# EAGLE board BPv4-LCDv3 (EAGLE 5.09)
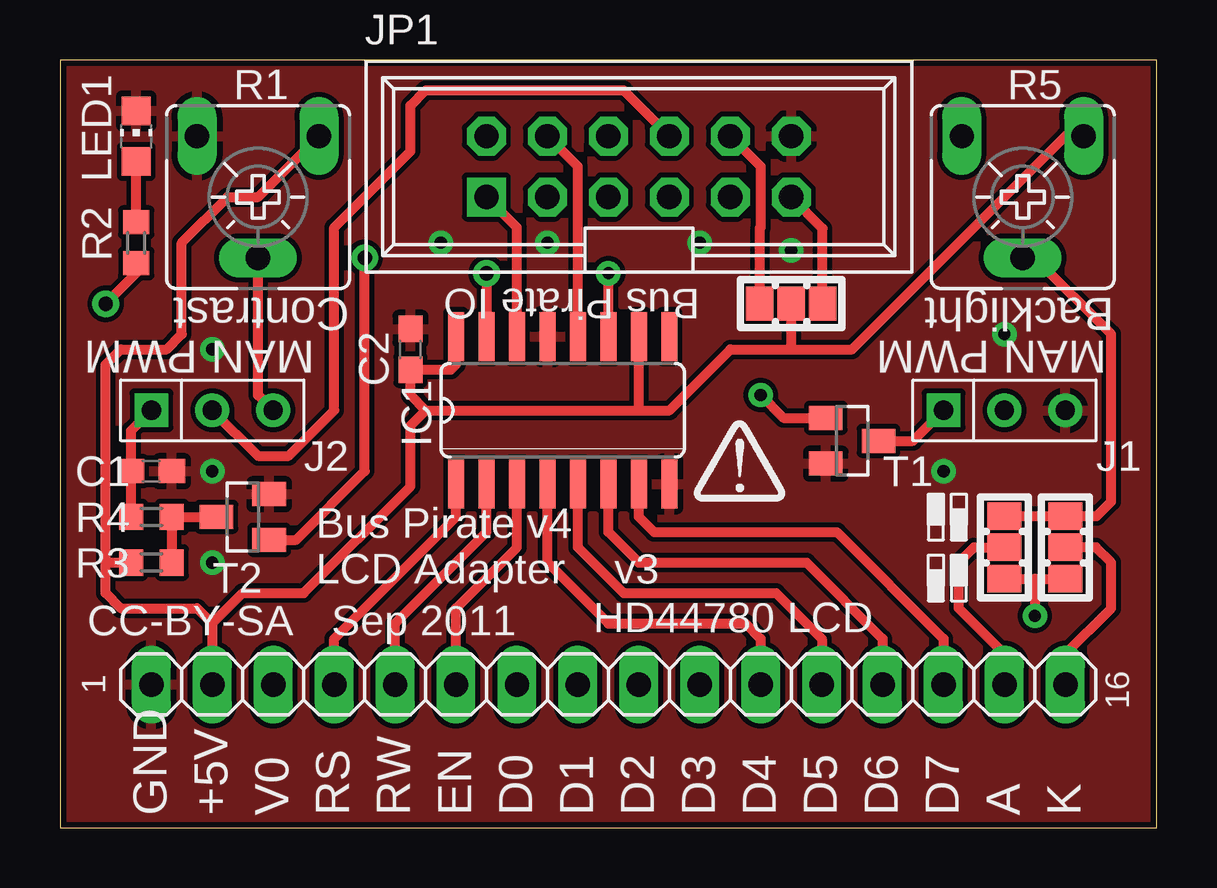
[diagram p0: board, top side]
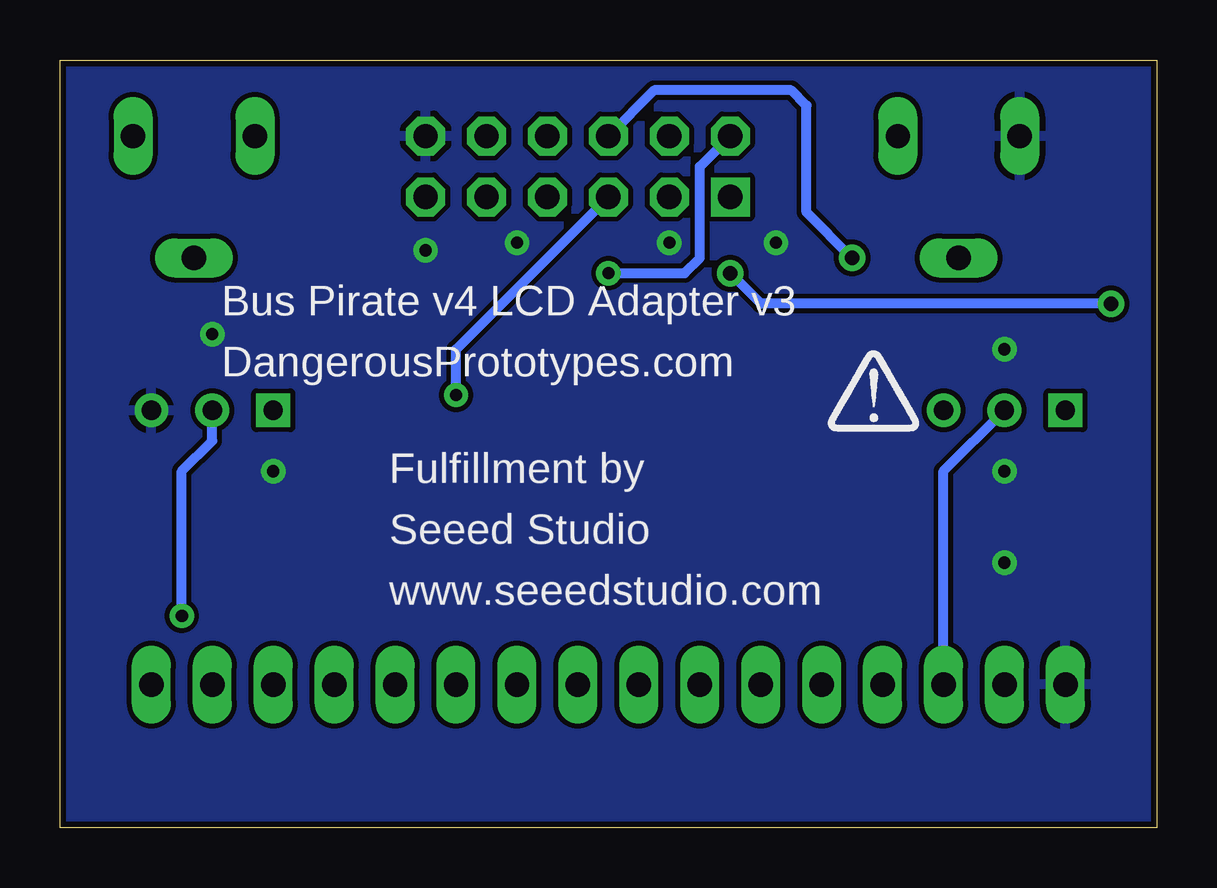
[diagram p1: board, bottom side, seen from below]

Size 45.72 x 32 mm. Coordinates in mm from the lower left corner, seen from the top.
Outline: 0,0 45.72,0 45.72,32 0,32 0,0
Copper layers (1*16): Top 0.035mm / dielectric 1.5mm / Bottom 0.035mm
Design rules "SparkFun": minimum track width 8mil, minimum drill 20mil, track to track 8mil, track to pad 8mil, pad to pad 8mil, via to via 8mil, smd to smd 8mil, copper to edge 10mil, drill to drill 8mil, minimum pad ring 12mil, minimum via ring 10mil, stop-mask expansion 4mil, vias tented up to drill 25mil, thermal gap 10mil

## Footprints (pad centres in the part's own frame; a part is rotated, then mirrored left to right if it is on the bottom)
C603 = smd 1.1 x 1: 1 -0.85,0; 2 0.85,0
SO16 = smd 0.66 x 2.032: 1 -4.445,-3.073; 2 -3.175,-3.073; 3 -1.905,-3.073; 4 -0.635,-3.073; 5 0.635,-3.073; 6 1.905,-3.073; 7 3.175,-3.073; 8 4.445,-3.073; 9 4.445,3.073; 10 3.175,3.073; 11 1.905,3.073; 12 0.635,3.073; 13 -0.635,3.073; 14 -1.905,3.073; 15 -3.175,3.073; 16 -4.445,3.073
M1X3 = drill 0.8 square: 1 0,0 | drill 0.8 round: 2 2.54,0; 3 5.08,0
PINSHRD_PTH_2X06 = drill 1.016 square: 1 -6.35,-1.27 | drill 1.016 octagon: 2 -6.35,1.27; 3 -3.81,-1.27; 4 -3.81,1.27; 5 -1.27,-1.27; 6 -1.27,1.27; 7 1.27,-1.27; 8 1.27,1.27; 9 3.81,-1.27; 10 3.81,1.27; 11 6.35,-1.27; 12 6.35,1.27
1X16 = drill 1.016 long: 1 -19.05,0; 2 -16.51,0; 3 -13.97,0; 4 -11.43,0; 5 -8.89,0; 6 -6.35,0; 7 -3.81,0; 8 -1.27,0; 9 1.27,0; 10 3.81,0; 11 6.35,0; 12 8.89,0; 13 11.43,0; 14 13.97,0; 15 16.51,0; 16 19.05,0
CHIP-LED0805 = smd 1.2 x 1.2: A 0,-1.05; C 0,1.05
CA6V = drill 1.016 long: A -2.54,-2.54; E 2.54,-2.54; S 0,2.54
R603 = smd 1 x 1.1: 1 -0.85,0; 2 0.85,0
JUMP_SOLDER = smd 1.143 x 1.422: 1 -1.308,0; 2 0,0; 3 1.308,0
SOT23 = smd 1 x 1.4: 1 -0.95,-1.1; 2 0.95,-1.1; 3 0,1.1

## Placement (x,y rotation side)
C1  1u  [C603]  3.81,14.86 180 top
C2  100n  [C603]  14.6,19.94 270 top
IC1  74HCT595D  [SO16]  20.95,17.4 0 top
J1  HEADER1X3PTH  [M1X3]  36.83,17.4 0 top
J2  HEADER1X3PTH  [M1X3]  3.81,17.4 0 top
JP1  PINSHRD-PTH-2X06  [PINSHRD_PTH_2X06]  24.13,27.56 0 top
LCD  [1X16]  22.86,5.97 0 top
LED1  [CHIP-LED0805]  3.18,28.83 0 top
R1  10K  [CA6V]  8.26,26.29 180 top
R2  1K  [R603]  3.18,24.38 90 top
R3  1K  [R603]  3.81,11.05 180 top
R4  100R  [R603]  3.81,12.95 0 top
R5  100R  [CA6V]  40.13,26.29 180 top
SJ1  JUMP3S  [JUMP_SOLDER]  30.48,21.84 0 top
SJ2A  JUMP3S  [JUMP_SOLDER]  39.37,11.68 90 top
SJ2B  JUMP3S  [JUMP_SOLDER]  41.91,11.68 270 top
T1  BS170  [SOT23]  33.02,16.13 270 top
T2  BS170  [SOT23]  7.62,12.95 90 top
U$1  [DP_LOGO]  28.32,14.22 0 top
U$2  [DP_LOGO]  11.81,17.14 0 bottom

## Library data of the parts
C1 C2 J1 J2 JP1 R2-R4 SJ1 SJ2A SJ2B T1 T2 U$1 U$2 = dp_devices
IC1 = 74xx-eu
LCD = pinhead
LED1 = led
R1 R5 = pot

## Nets
A: LCD.15 SJ2A.2
ADC: J2.2 JP1.8 LCD.3
AUX0: JP1.5 T1.1
AUX1: JP1.6 T2.1
AUX2: JP1.7
BL: J1.2 SJ2A.1 SJ2B.3
CLOCK: IC1.11 JP1.2
CS: IC1.12 JP1.4
D0: LCD.7
D01: LCD.8
D02: LCD.9
D03: LCD.10
D04: IC1.4 LCD.11
D05: IC1.5 LCD.12
D06: IC1.6 LCD.13
D07: IC1.7 LCD.14
EN: IC1.3 LCD.6
GND: C1.1 C2.1 IC1.8 IC1.13 J1.3 JP1.12 LCD.1 LED1.C R1.E T1.2 T2.2
K: LCD.16 SJ2B.2
MISO: JP1.3
MOSI: IC1.14 JP1.1
N$1: LED1.A R2.2
N$2: IC1.15 R2.1
N$3: C1.2 J2.1 R4.1
N$4: R3.1 R4.2 T2.3
N$5: R5.S SJ2A.3 SJ2B.1
N$6: J1.1 T1.3
N$7: J2.3 R1.S
RS: IC1.1 LCD.4
RW: IC1.2 LCD.5
SWV33: JP1.10 SJ1.1
SWV50: JP1.11 SJ1.3
VCC: C2.2 IC1.10 IC1.16 LCD.2 R1.A R3.2 R5.A SJ1.2
VEXTERN: JP1.9

## Tracks (layer width: path | path; a pad name or v marks a point on that pad's centre or on a via)
A
  Top 0.406: LCD.15 39.37,7.24 37.46,9.14 37.46,11.05 38.1,11.68 SJ2A.2
ADC
  Top 0.406: J2.2 8.26,15.49 9.53,15.49 11.43,17.4 11.43,25.02 14.6,28.19 14.6,30.1 15.24,30.73 23.49,30.73 JP1.8
  Bottom 0.406: J2.2 8.89,14.86 LCD.3
AUX0  (via drill 0.51)
  Top 0.406: T1.1 30.16,17.08 v29.21,18.03
  Bottom 0.406: JP1.5 29.21,19.94 v29.21,18.03
AUX1  (via drill 0.6)
  Top 0.406: T2.1 9.85,12 12.7,14.86 v12.7,23.75
  Bottom 0.406: v12.7,23.75 14.6,25.65 14.6,30.1 15.24,30.73 20.95,30.73 JP1.6
BL  (via drill 0.51)
  Top 0.406: SJ2A.1 40.64,10.38 | 40.64,10.38 SJ2B.3 | 40.64,10.38 v40.64,8.83
  Bottom 0.406: v40.64,8.83 40.64,14.86 39.37,16.13 J1.2
CLOCK  (via drill 0.51)
  Top 0.406: IC1.11 v22.86,23.11
  Bottom 0.406: v22.86,23.11 19.69,23.11 19.05,23.75 19.05,27.56 JP1.2
CS
  Top 0.406: IC1.12 21.59,27.56 JP1.4
D04
  Top 0.406: IC1.4 20.32,11.05 22.86,8.51 28.57,8.51 29.2,7.88 29.21,7.24 LCD.11
D05
  Top 0.406: 31.74,7.24 31.74,6.6 31.75,6.61 | IC1.5 21.59,11.68 23.49,9.78 29.84,9.78 31.75,7.87 31.75,6.61 | 31.75,6.61 LCD.12
D06
  Top 0.406: IC1.6 22.86,12.32 24.13,11.05 31.12,11.05 34.29,7.87 LCD.13
D07
  Top 0.406: IC1.7 24.13,12.95 24.77,12.32 32.38,12.32 36.83,7.87 LCD.14
EN
  Top 0.406: IC1.3 19.05,11.68 16.51,9.14 LCD.6
GND  (via drill 0.51)
  other vias: 26.67,24.38 6.35,19.94 20.32,24.38 36.83,14.86 15.88,24.38 6.35,14.86 6.35,11.05 39.37,20.57 30.48,24.07
  pour Bottom: 0,32 45.72,32 45.72,0 0,0
  pour Top: 0,32 45.72,32 45.72,0 0,0
K
  Top 0.406: LCD.16 41.91,7.24 43.81,9.14 43.81,11.05 43.18,11.68 SJ2B.2
MOSI
  Top 0.406: JP1.1 19.05,25.02 IC1.14
N$1
  Top 0.406: R2.2 LED1.A
N$2  (via drill 0.6)
  Top 0.406: R2.1 3.18,23.11 v1.91,21.84 | v17.78,23.11 IC1.15
  Bottom 0.406: v1.91,21.84 16.51,21.84 v17.78,23.11
N$3
  Top 0.406: R4.1 C1.2 2.96,16.55 J2.1
N$4
  Top 0.406: R3.1 R4.2 T2.3
N$5
  Top 0.406: R5.S 40.64,23.75 43.81,20.57 43.81,13.59 43.22,12.99 SJ2B.1 SJ2A.3
N$6
  Top 0.406: T1.3 35.56,16.13 36.2,16.76 J1.1
N$7
  Top 0.406: J2.3 8.26,18.03 R1.S
RS
  Top 0.406: LCD.4 11.43,7.87 16.51,12.95 IC1.1
RW
  Top 0.406: IC1.2 17.78,12.32 13.97,8.51 LCD.5
SWV33
  Top 0.406: JP1.10 29.21,27.56 29.21,25.02 29.17,24.98 SJ1.1
SWV50
  Top 0.406: SJ1.3 31.79,24.98 JP1.11
VCC
  Top 0.406: R1.A 8.26,26.29 6.99,26.29 5.08,24.38 5.08,20.57 4.45,19.94 2.54,19.94 1.91,19.3 1.91,11.05 | 24.13,17.4 IC1.10 | 24.13,17.4 25.4,17.4 27.94,19.94 30.48,19.94 | 30.48,19.94 33.02,19.94 41.91,28.83 R5.A | 15.24,17.4 24.13,17.4 | 1.91,11.05 1.91,9.78 2.54,9.14 5.71,9.14 6.35,8.51 | 6.35,8.51 LCD.2 | 1.91,11.05 R3.2 | IC1.16 16.51,20.57 | 30.48,19.94 SJ1.2 | 6.35,8.51 7.62,9.78 10.16,9.78 14.6,14.22 14.6,16.76 15.24,17.4 | 15.24,17.4 14.6,18.03 C2.2 16.3,19.09 16.51,19.3 IC1.16 | IC1.16 16.4,20.36

## Text on the board
tNames: Bus Pirate IO | Contrast | Backlight | MAN PWM | MAN PWM | Bus Pirate v4 | LCD Adapter | v3 | CC-BY-SA | Sep 2011 | HD44780 LCD | 1 | 16 | GND | +5V | V0 | RS | RW | EN | D0 | D1 | D2 | D3 | D4 | D5 | D6 | D7 | A | K
bNames: Bus Pirate v4 LCD Adapter v3 | DangerousPrototypes.com | Fulfillment by | Seeed Studio | www.seeedstudio.com